# Altium PCB Arduino NG Ahuratus-PCB.PcbDoc (part 6 of 6)
Units mm, origin at the board's own origin, x right, y up, seen from the top; angles counter-clockwise.
Board outline 69 x 53.5 mm, 2 copper layers (Top Layer, Bottom Layer); 37 components, 49 nets, 193 pads, 40 vias.
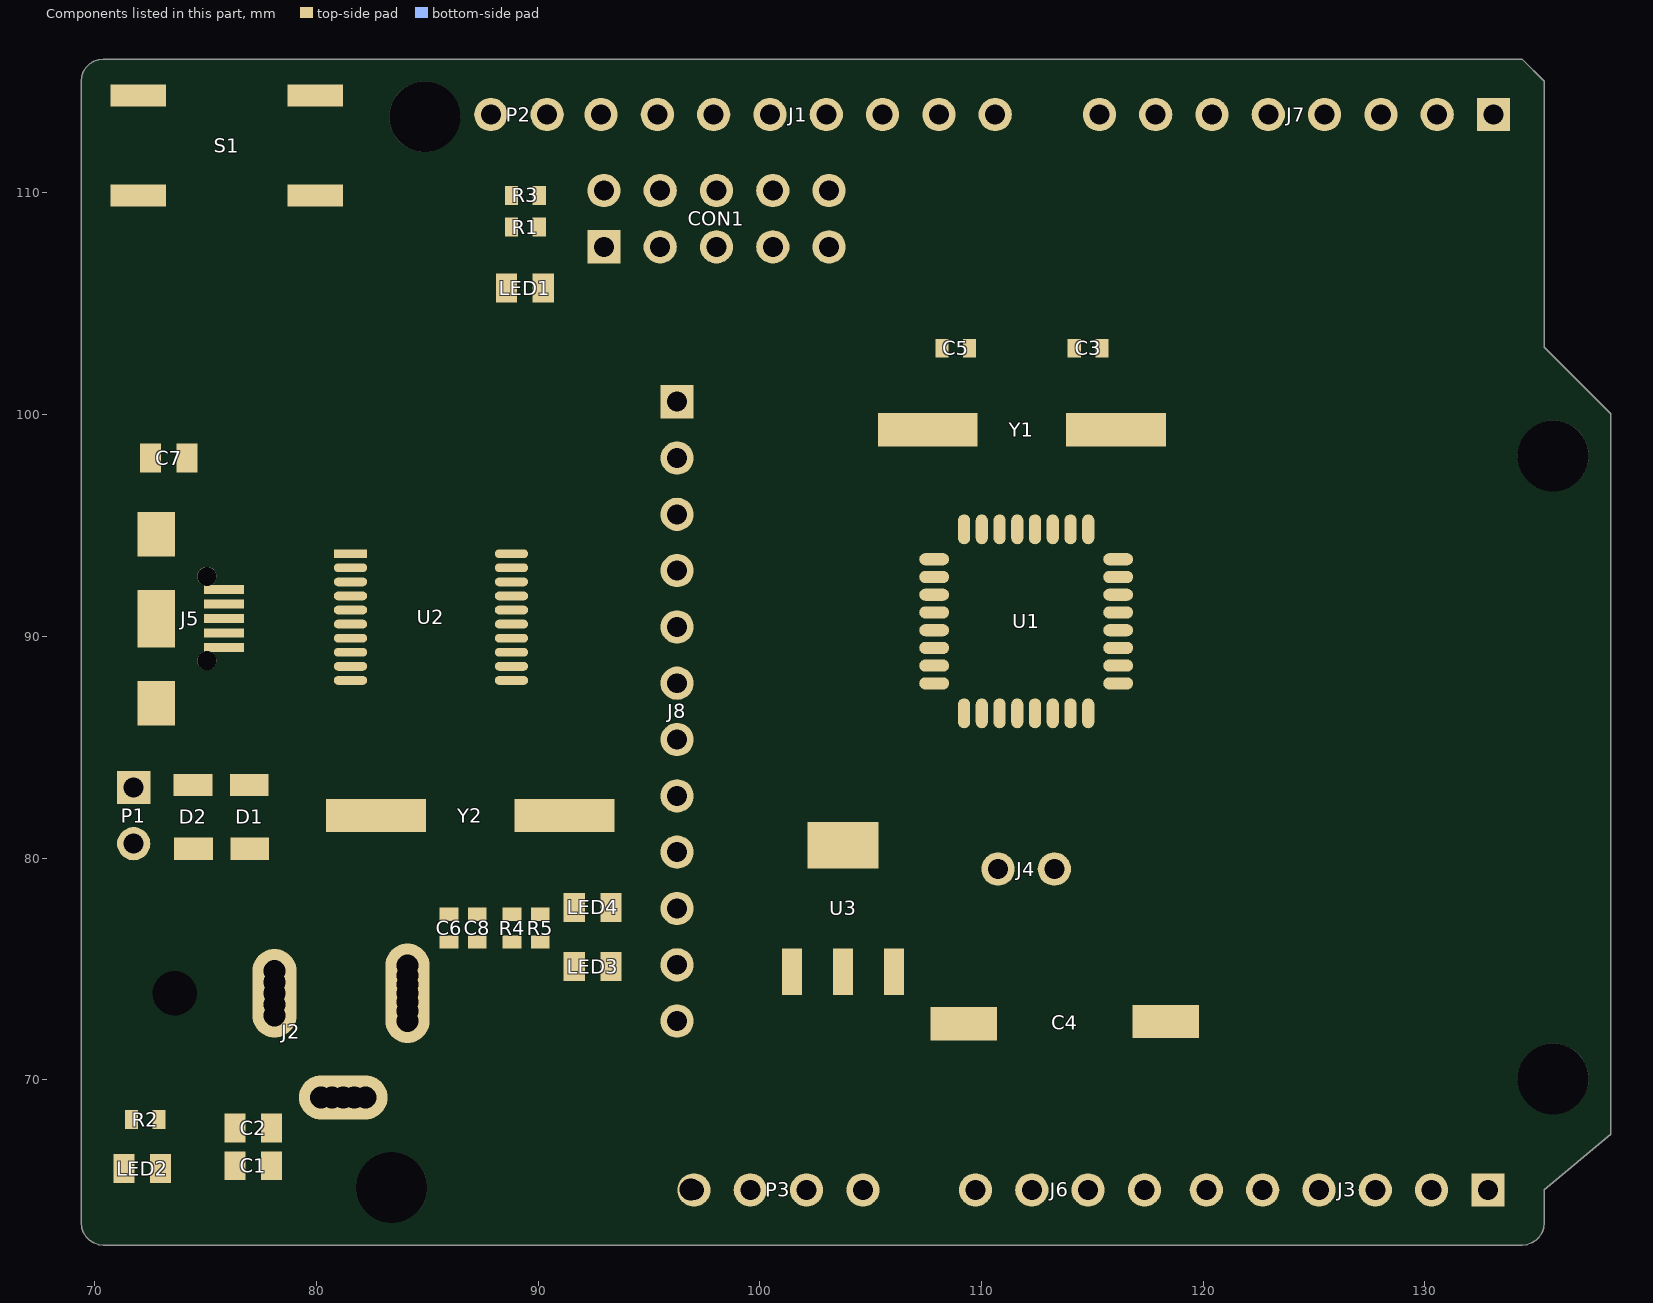
[diagram p6: the components of this part, seen from the top]

## Other copper
Top Layer:
  rectangle net GND: 77.597,68.135 78.434,72.39
  rectangle net RST: 78.689,105.664 86.117,109.891
  rectangle net GND: 82.612,88.392 87.681,91.313
  rectangle net VCC: 119.57,66.421 124.587,71.204
  rectangle net VCC: 85.87,63.627 95.694,67.393
  rectangle net GND: 118.999,100.965 122.428,102.743
  rectangle net GND: 106.553,104.013 114.3,108.966
  region net GND: 94.234,110.824 94.234,109.347 94.251,109.347 94.981,110.077
  pour cut-out: 91.456,112.463 91.456,106.553 104.378,106.553 104.378,112.327
  pour cut-out: 85.577,95.738 83.888,95.213 81.174,95.504 79.771,96.291 78.107,98.7 77.972,101.146 79.192,103.607 81.388,105.41 85.136,105.283 87.528,103.034 88.244,101.237 87.928,97.861
  pour cut-out: 84.093,95.27
  region net GND: 81.026,113.03 80.975,113.081 80.975,114.427 79.502,114.427 79.248,114.681
  region net GND: 96.52,114.681 96.52,113.03 96.266,113.03 95.631,113.665
  region net GND: 98.044,111.76 99.758,110.045 98.044,110.046
  region net NetJ3_4: 125.222,86.106 130.302,80.971 130.302,77.724 125.222,74.041 125.222,81.407
  region net GND: 87.681,93.857 86.874,93.857 83.986,90.969 87.681,90.969
  region net VCC: 99.568,66.493 98.425,67.627 100.584,67.619 99.568,66.548
  region net VCC: 95.595,66.226 96.961,67.725 94.765,67.564
  region net VCC: 85.87,66.385 84.836,67.338 86.201,67.463 86.106,66.421
  region net VCC: 119.761,71.945 120.523,71.13 119.253,71.093
  region net SCL: 133.427,69.596 133.604,74.698 131.953,76.349 131.953,71.07
  region net GND: 122.453,101.092 118.008,96.647 117.729,96.647 118.999,98.044 118.999,101.092
  region net NetJ7_4: 125.476,113.538 123.952,112.014 123.952,97.79 125.476,99.314
  region net RST: 71.954,109.855 75.438,109.855 75.946,110.321 75.946,111.887 76.609,112.385 79.656,112.385 78.503,113.538 73.389,113.538 71.954,112.102
  region net VCC: 106.045,69.5 105.41,68.707 105.918,68.834
  region net VCC: 85.396,69.635 86.206,68.824 84.963,68.707
  region net VCC: 119.761,71.945 119.761,66.421 116.967,66.421 116.078,65.405 116.078,70.77 117.444,72.136
  region net NetJ3_1: 132.08,64.897 132.08,69.099 132.842,68.453 132.842,65.278 132.207,64.869
  region net NetJ3_2: 128.397,71.501 128.397,66.294 130.302,65.024 130.302,69.723
  region net NetJ3_3: 126.873,65.024 127.635,64.669 127.762,70.358 126.873,71.292
  region net SCK: 109.214,86.528 107.569,84.836 108.491,84.836 109.214,85.559
  region net MISO: 107.864,87.878 103.505,87.878 103.124,87.612 103.124,86.727 103.251,86.233 107.114,86.233 107.864,86.983
  region net NetJ7_5: 118.11,96.012 122.936,100.838 122.936,97.917 121.031,96.012
  region net NetC5_2: 108.077,103.039 105.918,99.72 108.217,99.688
  region net NetC3_2: 115.697,102.616 118.161,99.933 115.43,99.708 115.43,102.997
  region net GND: 114.21,96.774 113.265,95.83 111.614,95.797 112.591,96.774
  region net GND: 115.697,104.14 118.999,100.711 118.999,102.616 117.475,104.14
  region net GND: 114.3,105.029 114.935,104.14 114.3,104.14
  region net GND: 114.3,104.14 109.628,104.14 114.3,109.141
  region net GND: 109.792,104.14
  region net VCC: 74.676,80.391 70.739,76.454 70.612,76.454 70.612,79.554 71.374,80.316 71.374,80.645 74.168,80.645
  region net NetC6_2: 86.106,77.724 80.827,77.724 79.883,78.668 79.883,83.312 80.01,83.312 81.28,82.042 81.852,82.614 85.026,82.614 86.296,81.343 86.296,77.648 86.106,77.457
  region net GND: 79.248,80.518
  region net NetC8_2: 89.408,81.28 87.249,81.28 87.249,82.423 87.376,82.296 89.408,82.296 89.408,81.661 89.662,81.407
  region net NetC8_2: 88.9,82.677 87.249,84.328 87.249,84.455 87.122,84.455 85.725,83.058 86.868,81.915 89.281,81.915 89.154,82.042 89.154,82.55 89.281,82.677
  region net NetC8_2: 87.249,83.439
  region net NetJ8_9: 93.472,83.566 93.455,83.549 89.258,83.549 88.265,84.542 88.265,88.011 89.154,88.011
  region net NetJ8_9: 93.599,83.388
  region net NetC8_2: 81.153,88.011 81.153,83.534 81.661,83.026 81.693,83.058 85.725,83.058 87.249,81.534 87.249,86.741 86.106,87.884
  region net NetC8_2: 81.407,87.884
  region net NetJ5_1-VBUS: 90.362,93.772 96.521,100.075 96.266,100.33 96.266,100.838 95.123,100.838 90.623,96.338 90.551,96.338 90.551,96.158 90.17,95.777
  region net NetJ3_4: 116.914,88.646 116.914,88.635 117.475,88.075 117.475,88.678
  region net NetJ3_4: 117.348,88.678 117.348,83.376 125.222,75.501 125.222,85.979 122.523,88.678
  region net VCC: 112.591,93.726 113.665,93.726 114.071,93.32 114.071,91.288 115.189,90.17 115.189,87.63 112.524,87.63 112.014,88.136 112.014,93.091
  region net MOSI: 104.013,105.791 104.013,106.847 102.957,105.791
  region net MOSI: 104.013,105.791 101.092,102.743 101.092,105.791
  region net MOSI: 99.314,107.061 101.092,105.791 101.092,102.616 99.314,104.394
  region net RST: 87.627,104.521 88.199,103.949 94.805,103.949 95.377,104.521
  region: 95.25,104.394
  region net RST: 87.503,104.902 88.646,103.949 87.503,103.949 87.376,104.394 87.503,104.521
  region net RST: 88.571,109.513 87.48,108.422 87.249,108.502 87.249,109.764 87.158,109.855 88.571,109.855
  region net RST: 87.503,103.949 87.503,109.855 81.597,109.855
  region net VCC: 85.471,72.678 85.471,68.25 83.629,68.25 83.629,73.088 83.947,73.406
  region net VCC: 107.061,67.309 82.612,67.309 84.127,68.961 106.045,68.961
  region net RST: 115.043,91.589 115.443,91.189 115.443,91.078 115.043,91.078
  region net RST: 115.064,93.726 115.064,91.099 115.043,91.078 114.532,91.589 114.532,93.218
  region net VCC: 112.591,93.726 112.591,87.63 109.22,87.63 109.22,93.726
  region net NetJ3_3: 116.078,87.249 116.586,87.757 115.57,87.757
  region: 116.069,86.741
  region net RXD-m8: 126.238,91.821 133.096,84.963 133.096,92.075
  region net RXD-m8: 122.936,92.121 123.063,92.121 123.063,92.248
  region net RXD-m8: 122.809,92.106 122.921,92.106 122.936,92.121 122.809,92.121 122.809,92.106 122.809,92.121 122.682,92.121 122.682,92.012 122.746,91.948
  region net RXD-m8: 133.096,102.618 133.096,91.948 132.842,91.694 116.713,91.694 116.586,91.821 116.713,91.948 123.063,91.948 123.063,92.136 122.555,92.075 122.428,91.948 123.063,91.948 123.063,92.121 122.936,92.121 122.682,92.121 122.555,91.948
  region net RXD-m8: 122.358,91.878
  text "Support:+989334333499" at 70.104,108.839 h1.1 r270
  text "AHURATUS CO." at 71.374,107.696 h0.35
  text "NG NEW" at 119.38,103.886 h0.38
  text "AHURATUS Company" at 135.509,76.835 h1.72 r90
  text "TXD" at 92.481,76.2 h0.5
  text "RXD" at 92.481,73.542 h0.5
  text "Designed & Developed By Ehsan Shaghaei" at 137.287,72.644 h1.32 r90
  text "Arduino.cc" at 98.933,69.977 h1.12
  text "Arduino NG 240 New" at 85.979,69.469 h1.52
  text "Ahuratus,INC" at 98.933,69.469 h0.42
  text "POWER" at 70.231,64.897 h0.5 r90
Bottom Layer:
  rectangle net GND: 94.488,62.611 135.001,63.754
  rectangle net RST: 69.85,63.627 70.612,111.67
  pour cut-out: 91.834,112.46 91.834,106.274 104.28,106.274 104.28,112.329
  pour cut-out: 84.105,98.281 86.74,99.568 87.547,100.406 88.36,102.159 88.615,104.454 87.808,106.299 86.8,107.589 84.074,108.839 80.899,108.458 80.222,107.94 78.405,105.537 77.919,102.252 78.452,100.729 80.416,99.037 83.083,98.084
  text "SINCE 2012" at 80.645,98.171 h0.38
  text "NG NEW 2019" at 121.615,96.291 h0.58
  text "Designed & Developed By Ehsan Shaghaei" at 137.287,96.139 h1.32 r90
  text "AHURATUS Company" at 135.509,93.091 h1.72 r90

## Silkscreen, mask and mechanical layers (free items; w line width, h text height)
Top Overlay:
  drawing of 4191 lines, arcs and shapes, not listed
  text "1" at 130.937,115.316 h1 r90
  text "Reset" at 79.817,115.189 h0.5
  text "SCL" at 87.249,115.189 h0.5
  text "SDA" at 89.871,115.189 h0.5
  text "AREF" at 91.948,115.189 h0.5
  text "GND" at 94.615,115.189 h0.8
  text "11" at 103.124,115.189 h0.5 r90
  text "9" at 108.331,115.189 h1 r90
  text "8" at 110.998,115.189 h1 r90
  text "7" at 115.824,115.189 h1 r90
  text "5" at 120.904,115.189 h1 r90
  text "0" at 133.477,115.189 h0.8 r90
  text "6" at 118.364,115.141 h1 r90
  text "4" at 123.19,115.141 h1 r90
  text "3" at 125.984,115.141 h1 r90
  text "2" at 128.524,115.141 h1 r90
  text "13" at 98.171,115.062 h0.5 r90
  text "12" at 100.711,115.062 h0.5 r90
  text "10" at 105.664,115.062 h0.5 r90
  text "--------------------------Digital--------------------------" at 97.536,111.379 h0.64
  text "TX" at 129.921,109.347 h0.58
  text "RX" at 132.461,109.347 h0.58
  text "Support:+989334333499" at 70.104,108.839 h1.1 r270
  text "AHURATUS CO." at 71.374,107.696 h0.35
  text "ISP" at 92.075,107.112 h0.58 r90
  text "NG NEW" at 119.38,103.886 h0.38
  text "USB2TTL" at 94.615,102.362 h0.5
  text "VCC USB" at 98.044,99.949 h0.5
  text "RS232" at 98.044,97.663 h0.5
  text "GND" at 98.044,95.25 h0.5
  text "DTS#" at 97.917,92.71 h0.5
  text "DTR#" at 97.917,90.17 h0.5
  text "DCD#" at 97.917,87.63 h0.5
  text "RI#" at 97.917,85.09 h0.5
  text "USB Power" at 69.85,84.836 h0.5
  text "DSR#" at 97.79,82.423 h0.5
  text "CTS#" at 97.79,79.883 h0.5
  text "TXD" at 97.917,77.47 h0.5
  text "ADC 6,7" at 110.446,77.285 h0.5
  text "AHURATUS Company" at 135.509,76.835 h1.72 r90
  text "TXD" at 92.481,76.2 h0.5
  text "RXD" at 97.917,74.93 h0.5
  text "RXD" at 92.481,73.533 h0.5
  text "Designed & Developed By Ehsan Shaghaei" at 137.287,72.644 h1.32 r90
  text "ACT#" at 97.79,72.39 h0.5
  text "Arduino.cc" at 98.933,69.977 h1.12
  text "Arduino NG 240 New" at 85.979,69.469 h1.52
  text "Ahuratus,INC" at 98.933,69.469 h0.42
  text "Since 2012" at 100.457,68.961 h0.35
  text "---POWER----------------------------" at 95.885,66.675 h0.64
  text "--------Analog---------" at 119.634,66.675 h0.64
  text "POWER" at 70.231,64.897 h0.5 r90
  text "5V DC IN" at 75.057,64.008 h0.58 r90
  text "GND" at 111.76,62.992 h0.5
  text "GND" at 114.3,62.992 h0.5
  text "+5V" at 98.679,62.865 h0.5
  text "RES" at 101.346,62.865 h0.5
  text "+3.3V" at 103.505,62.865 h0.5
  text "VCC" at 108.966,62.865 h0.5
  text "VIN" at 116.721,62.865 h0.5
  text "A1" at 130.556,62.865 h0.5 r90
  text "A5" at 120.396,62.738 h0.5 r90
  text "A4" at 122.936,62.738 h0.5 r90
  text "A3" at 125.476,62.738 h0.5 r90
  text "A2" at 128.016,62.738 h0.5 r90
  text "A0" at 133.096,62.738 h0.5 r90
Mechanical 1:
  lines w0.254: 70.555,116.078 134.239,116.078 135.382,114.935 135.382,102.997 138.43,99.949 138.43,67.564 138.303,67.437 135.382,65.024 135.382,63.299 cw(c134.948,63.299) 135.255,62.992 cw(c134.029,64.218) 134.029,62.484 106.807,62.484 70.358,62.484 cw(c70.358,63.5) 69.342,63.5 69.342,67.945 69.342,114.681 69.342,115.084 cw(c70.209,115.084) 69.596,115.697 cw(c70.516,114.777) 70.516,116.078 70.612,116.078